# EAGLE board barduino (EAGLE 8.5.2)
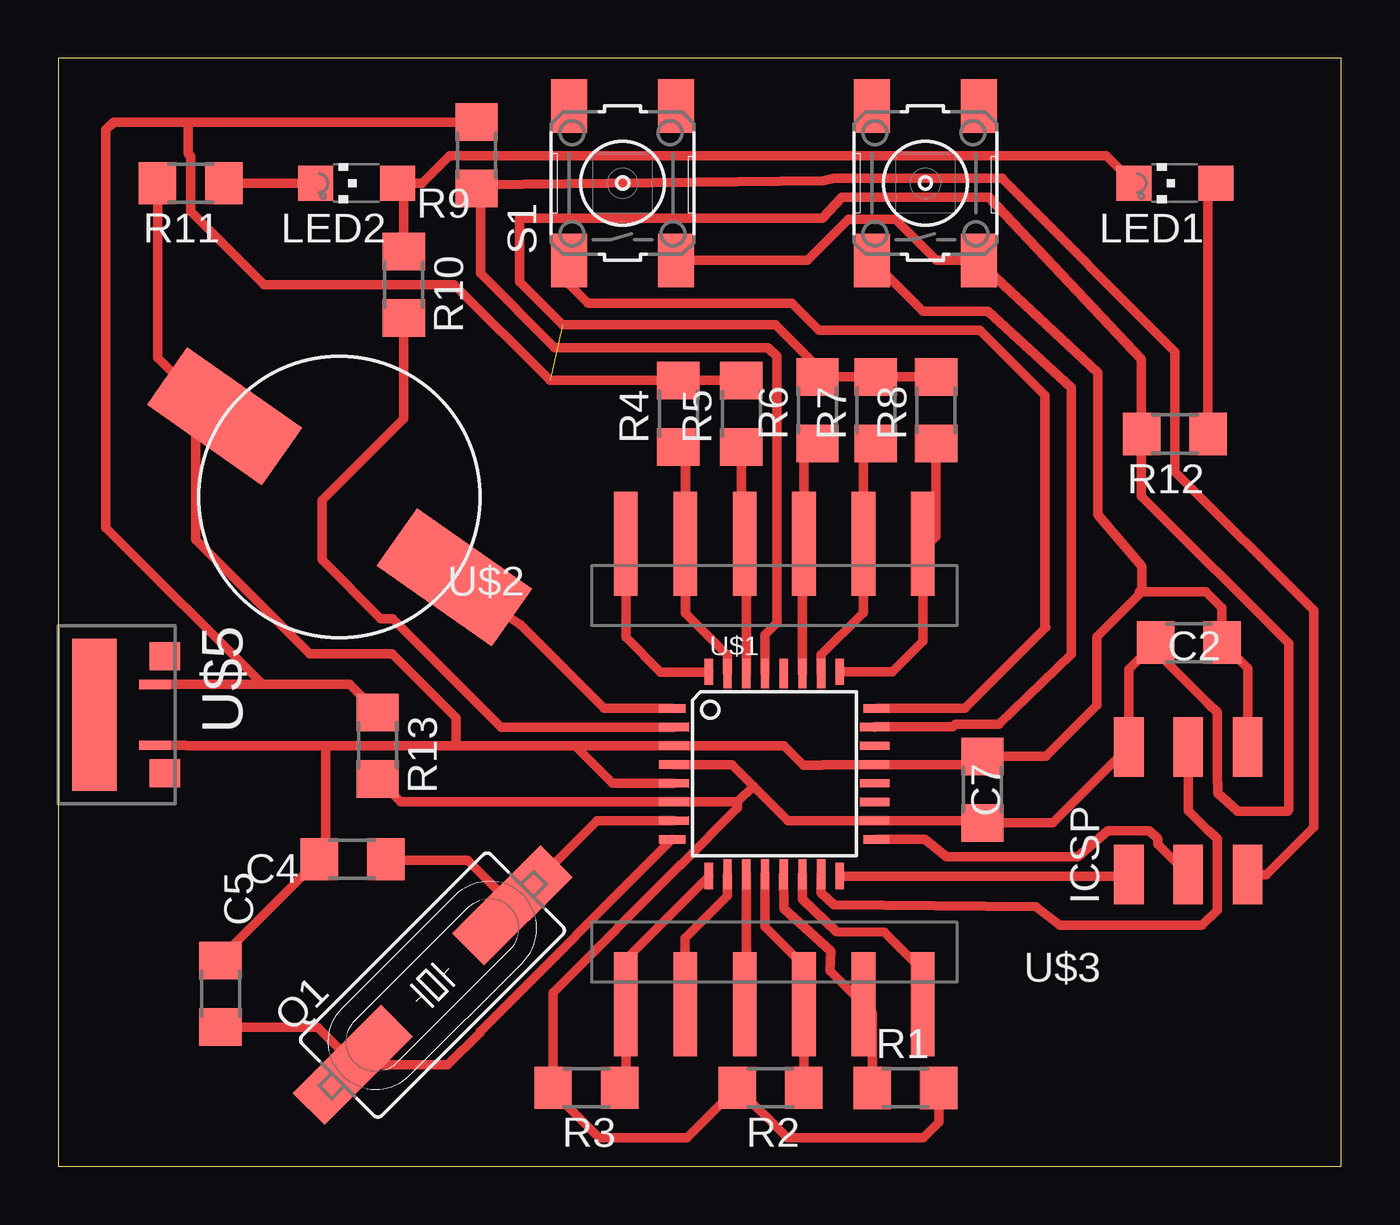
[diagram p0: board, top side]

Size 54.86 x 47.37 mm. Coordinates in mm from the lower left corner, seen from the top.
Outline: 0,0 54.86,0 54.86,47.37 0,47.37 0,0
Copper layers (1*16): Top 0.035mm / dielectric 1.5mm / Bottom 0.035mm
Design rules "default *": minimum track width 10mil, minimum drill 24mil, track to track 8mil, track to pad 8mil, pad to pad 8mil, via to via 8mil, smd to smd 8mil, copper to edge 40mil, drill to drill 8mil, minimum pad ring 12mil, minimum via ring 8mil, stop-mask expansion 4mil, vias tented up to drill 0mil, thermal gap 10mil
Net classes: 0 default: width 0.635 mm, clearance 0.406 mm; 1 power: width 0.635 mm, clearance 0.406 mm

## Footprints (pad centres in the part's own frame; a part is rotated, then mirrored left to right if it is on the bottom)
1206 = smd 1.6 x 1.803: 1 -1.422,0; 2 1.422,0
2X03SMD = smd 2.54 x 1.27: 1 -2.54,2.54; 2 2.92,2.54; 3 -2.54,0; 4 2.92,0; 5 -2.54,-2.54; 6 2.92,-2.54
CHIPLED_1206 = smd 1.5 x 1.5: A 0,-1.75; C 0,1.75
HC49UP = smd 5.334 x 1.93: 1 -4.826,0; 2 4.826,0
R1206 = smd 1.6 x 1.803: 1 -1.422,0; 2 1.422,0
6MM_SWITCH = smd 2.286 x 1.524: 1 -3.302,2.286; 2 3.302,2.286; 3 -3.302,-2.286; 4 3.302,-2.286
TQFP32-08THIN = smd 1.118 x 0.356: 1 -4.369,2.8; 8 -4.369,-2.8; 17 4.369,-2.8; 24 4.369,2.8 | smd 1.27 x 0.356: 2 -4.293,2; 3 -4.293,1.2; 4 -4.293,0.4; 5 -4.293,-0.4; 6 -4.293,-1.2; 7 -4.293,-2; 18 4.293,-2; 19 4.293,-1.2; 20 4.293,-0.4; 21 4.293,0.4; 22 4.293,1.2; 23 4.293,2 | smd 0.356 x 1.118: 9 -2.8,-4.369; 16 2.8,-4.369; 25 2.8,4.369; 32 -2.8,4.369 | smd 0.356 x 1.27: 10 -2,-4.293; 14 1.2,-4.293; 15 2,-4.293; 26 2,4.293; 27 1.2,4.293; 31 -2,4.293 | smd 0.35 x 1.27: 11 -1.2,-4.293; 12 -0.4,-4.293; 13 0.4,-4.293; 28 0.4,4.293; 29 -0.4,4.293; 30 -1.2,4.293
HEADER = smd 1.016 x 4.445: 1 -6.35,2.223; 2 -3.81,2.223; 3 -1.27,2.223; 4 1.27,2.223; 5 3.81,2.223; 6 6.35,2.223
CD-1206-SMT-LRG = smd 6 x 3: P$1 -6,0; P$2 6,0
DX4R005HJ5-PWR-PADS = smd 0.4 x 1.35: GND 1.3,4.125; VBUS -1.3,4.125 | smd 6.5 x 1.9: S1 0,1.55; S4 0,1.55 | smd 1.2 x 1.3: S2 -2.5,4.55; S3 2.5,4.55

## Placement (x,y rotation side)
C2  10uF  [1206]  48.34,22.4 180 top
C4  18pF  [1206]  12.58,13.13 0 top
C5  18pF  [1206]  6.93,7.38 270 top
C7  .1uF  [1206]  39.52,16.11 270 top
ICSP  PROG  [2X03SMD]  48.33,15.02 90 top
LED1  AM  [CHIPLED_1206]  47.75,42.04 90 top
LED2  PM  [CHIPLED_1206]  12.75,42.04 90 top
Q1  16MHz  [HC49UP]  16,7.75 45 top
R1  [R1206]  36.23,3.35 0 top
R2  [R1206]  30.45,3.37 180 top
R3  [R1206]  22.58,3.37 180 top
R4  [R1206]  26.52,32.18 90 top
R5  [R1206]  29.21,32.17 90 top
R6  [R1206]  32.46,32.33 90 top
R7  [R1206]  34.96,32.33 90 top
R8  [R1206]  37.54,32.33 90 top
R9  10K  [1206]  17.88,43.23 90 top
R10  [R1206]  14.77,37.69 270 top
R11  [R1206]  5.66,42.04 180 top
R12  [R1206]  47.75,31.31 180 top
R13  [R1206]  13.65,17.99 270 top
S0  [6MM_SWITCH]  37.08,42.04 90 top
S1  [6MM_SWITCH]  24.13,42.04 90 top
U$1  ATMEGA88-THIN  [TQFP32-08THIN]  30.62,16.78 0 top
U$2  HEADER  [HEADER]  30.62,24.4 0 top
U$3  HEADER  [HEADER]  30.62,9.16 180 top
U$4  BUZZERLARGE-PADS  [CD-1206-SMT-LRG]  12.02,28.62 145 top
U$5  MICRO-USB-PWRLARGE-PADS  [DX4R005HJ5-PWR-PADS]  0,19.3 270 top

## Library data of the parts
C2 C4 C5 C7 R9 S0 S1 = ng
ICSP U$1 = fab
LED1 LED2 = led
Q1 = crystal; OC_FARNELL: unknown; OC_NEWARK: unknown
R1-R8 R10-R13 = resistor
U$2-U$5 = 4-Digit-Clock

## Nets
A0: S0.1 U$1.23
A1: S1.1 U$1.24
A2: R8.1 U$1.25 U$2.6
A3: R7.1 U$1.26 U$2.5
A4: R6.1 U$1.27 U$2.4
A5: U$1.28
D0: R5.1 U$1.30 U$2.3
D1: R4.1 U$1.31 U$2.2
D2: U$1.32 U$2.1
D3: U$1.1 U$4.P$1
D4: R10.2 U$1.2
D5: R3.1 U$1.9 U$3.6
D6: U$1.10 U$3.5
D7: U$1.11 U$3.4
D8: R2.1 U$1.12 U$3.3
D9: R1.1 U$1.13 U$3.2
D10: U$1.14 U$3.1
GND [power]: C2.1 C4.1 C5.1 C7.1 ICSP.6 R11.2 S0.3 S1.3 U$1.3 U$1.5 U$1.21 U$4.P$2 U$5.GND
MISO-D12: ICSP.1 U$1.16
MOSI-D11: ICSP.4 U$1.15
N$1 [power]: LED1.A R12.1
N$2: LED2.C R11.1
N$3: LED1.C LED2.A R10.1
PB6: C4.2 Q1.2 U$1.7
PB7: C5.2 Q1.1 U$1.8
RESET: ICSP.5 R9.1 U$1.29
SCK-D13: ICSP.3 U$1.17
VCC [power]: C2.2 C7.2 ICSP.2 R1.2 R2.2 R3.2 R4.2 R5.2 R6.2 R7.2 R8.2 R9.2 R12.2 R13.1 R13.2 U$1.4 U$1.6 U$1.18 U$5.VBUS

## Tracks (layer width: path | path; a pad name or v marks a point on that pad's centre or on a via)
A0
  Top 0.406: U$1.23 34.93,18.8 38.26,18.8 38.37,18.91 40.22,18.91 43.33,21.89 43.33,24.77 43.32,24.95 43.32,33.29 39.76,36.56 36.98,36.56 S0.1
A1
  Top 0.406: U$1.24 38.77,19.58 42.24,23.05 42.19,23.09 42.19,32.97 39.43,35.74 32.54,35.74 31.39,36.89 22.66,36.89 21.84,37.71 S1.1
A2
  Top 0.406: U$1.25 35.68,21.15 36.97,22.44 36.97,26.34 | 36.97,26.34 U$2.6 | R8.1 37.54,26.91 36.97,26.34
A3
  Top 0.406: U$1.26 32.62,21.86 34.43,23.67 U$2.5 34.43,30.38 R7.1
A4
  Top 0.406: U$1.27 31.82,26.55 U$2.4 31.89,30.34 R6.1
D0
  Top 0.406: U$1.30 29.42,26.4 | 29.42,26.4 29.42,26.55 U$2.3 | R5.1 29.21,26.62 29.42,26.4
D1
  Top 0.406: U$1.31 28.62,21.84 26.81,23.65 U$2.2 | U$2.2 | U$2.2 26.81,30.46 R4.1
D2
  Top 0.406: U$2.1 24.27,22.62 25.76,21.13 27.81,21.13 U$1.32
D3
  Top 0.406: 18.23,24.19 19.77,23.15 23.34,19.58 25.19,19.58 U$1.1
  Top 0.635: 18.23,24.19 U$4.P$1
D4
  Top 0.406: U$1.2 18.94,18.78 14.3,23.42 13.79,23.42 11.28,25.93 11.28,28.48 14.77,31.97 R10.2
D5
  Top 0.406: U$1.9 24.27,8.86 U$3.6 24.27,3.63 R3.1
D6
  Top 0.406: U$1.10 28.62,11.57 26.8,9.75 26.8,6.95 U$3.5
D7
  Top 0.406: U$1.11 29.42,7.01 U$3.4
D8
  Top 0.406: U$1.12 30.22,10.25 31.89,8.58 U$3.3 31.89,3.39 R2.1
D9
  Top 0.406: U$1.13 31.04,11.01 33.04,9.2 33.01,8.36 U$3.2 34.81,6.56 R1.1
D10
  Top 0.406: U$1.14 31.82,11.41 33.29,10.02 35.32,10.01 36.97,8.36 U$3.1
GND
  Top 0.406: ICSP.6 50.87,21.29 C2.1 49.75,22.41 49.75,23.89 49.07,24.57 46.34,24.57 | 46.24,24.57 46.34,24.57 | C7.1 39.17,17.18 U$1.21 32.7,17.18 32.66,17.15 31.86,17.15 31.03,17.98 U$1.3 22.1,17.98 | C7.1 39.46,17.73 | 39.46,38.59 S0.3 37.56,38.73 35.81,40.49 33.78,40.49 32.03,38.73 S1.3 | C7.1 42.24,17.53 44.42,19.71 44.42,22.65 46.34,24.57 | 39.35,38.7 39.46,38.59 | 46.34,24.57 46.34,25.65 44.45,27.86 44.45,33.92 39.46,38.59 | 22.1,17.98 17.02,17.98 | 17.02,17.98 11.43,17.98 | C5.1 6.93,9.16 7.18,9.16 C4.1 11.43,13.4 11.43,17.98 | 11.43,17.98 5.49,17.98 5.45,18.01 | 5.45,18.01 4.13,18.01 | 17.02,17.98 17.02,19.18 14.28,21.92 10.75,21.92 5.88,26.79 5.88,32.92 4.24,34.56 R11.2 4.1,41.9 | U$1.5 23.7,16.38 22.1,17.98 | U$5.GND 5.44,18 5.45,18.01
  Top 0.635: U$4.P$2 5.88,32.92 6.01,32.98
MISO-D12
  Top 0.406: U$1.16 37.72,12.41 37.73,12.4 37.81,12.41 45.72,12.41 ICSP.1
MOSI-D11
  Top 0.406: U$1.15 32.62,11.7 33.16,11.19 41.82,11.1 42.84,10.31 48.87,10.31 48.92,10.3 49.57,10.95 49.57,14 49.21,14.36 49.19,14.36 48.34,15.2 48.34,17.92 ICSP.4
N$1
  Top 0.406: R12.1 49.17,41.71 LED1.A
N$2
  Top 0.406: LED2.C R11.1
N$3
  Top 0.406: 14.5,41.92 LED2.A 14.73,42.04 | 14.73,42.04 15.55,42.04 16.73,43.21 44.83,43.21 LED1.C | R10.1 14.77,42 14.73,42.04
PB6
  Top 0.406: U$1.7 23.03,14.78 Q1.2 17.49,13.08 14.04,13.08 C4.2
PB7
  Top 0.406: U$1.8 18.03,5.76 18.03,5.71 16.65,4.33 12.7,4.33 | 12.7,4.33 Q1.1 | C5.2 11.08,5.95 12.7,4.33
RESET
  Top 0.406: ICSP.5 51.67,12.48 53.7,14.5 53.7,23.77 47.76,29.7 47.76,34.84 40.4,42.2 40.37,42.25 33.17,42.25 32.71,42.14 18.05,41.98 18.05,41.83 18.05,38.18 21.22,35.01 30.36,35.01 30.73,34.63 30.73,23.24 30.23,22.73 U$1.29
  Top 0.635: R9.1 17.99,41.83 18.05,41.83
SCK-D13
  Top 0.406: U$1.17 37.07,13.98 37.98,13.25 43.61,13.25 44.9,14.36 46.67,14.36 47.03,14 47.03,13.77 ICSP.3
VCC  (1 unrouted)
  Top 0.406: 46.75,22.22 45.79,21.26 ICSP.2 42.54,14.69 C7.2 39.42,14.78 U$1.18 31.21,14.78 29.73,16.26 | 46.75,22.22 C2.2 | U$1.4 28.81,17.18 29.73,16.26 | 29.06,15.58 U$1.6 14.64,15.58 R13.2 | 29.06,15.58 29.73,16.26 | 46.75,22.22 49.15,19.82 49.21,19.77 49.57,19.41 49.57,16.46 49.58,16.35 49.58,15.94 50.43,15.2 50.43,15.19 52.58,15.19 52.63,15.24 52.63,22.36 46.33,28.66 R12.2 46.33,34.27 46.33,34.51 39.79,41.44 33.51,41.44 32.68,40.54 19.72,40.54 19.72,37.82 21.56,35.98 30.67,35.98 32.46,34.19 R6.2 R7.2 R8.2 | U$5.VBUS 8.73,20.6 | 8.73,20.6 12.46,20.6 R13.1 | 8.73,20.6 2.03,27.3 2.03,44.32 2.36,44.65 5.54,44.65 | R1.2 37.66,1.88 37,1.22 31.17,1.22 R2.2 26.88,1.22 23.12,1.22 21.16,3.18 R3.2 21.16,7.43 26.62,12.89 26.63,12.9 29.06,15.33 29.06,15.58 | 5.54,44.65 5.54,43.29 5.65,43.19 5.65,40.85 8.79,37.7 16.93,37.7 21.03,33.6 R4.2 R5.2 | R9.2 5.54,44.65 | 5.54,44.65
  Top 0.635: R9.2 | 17.99,44.7 R9.2